# Allegro board NE555_2303.brd
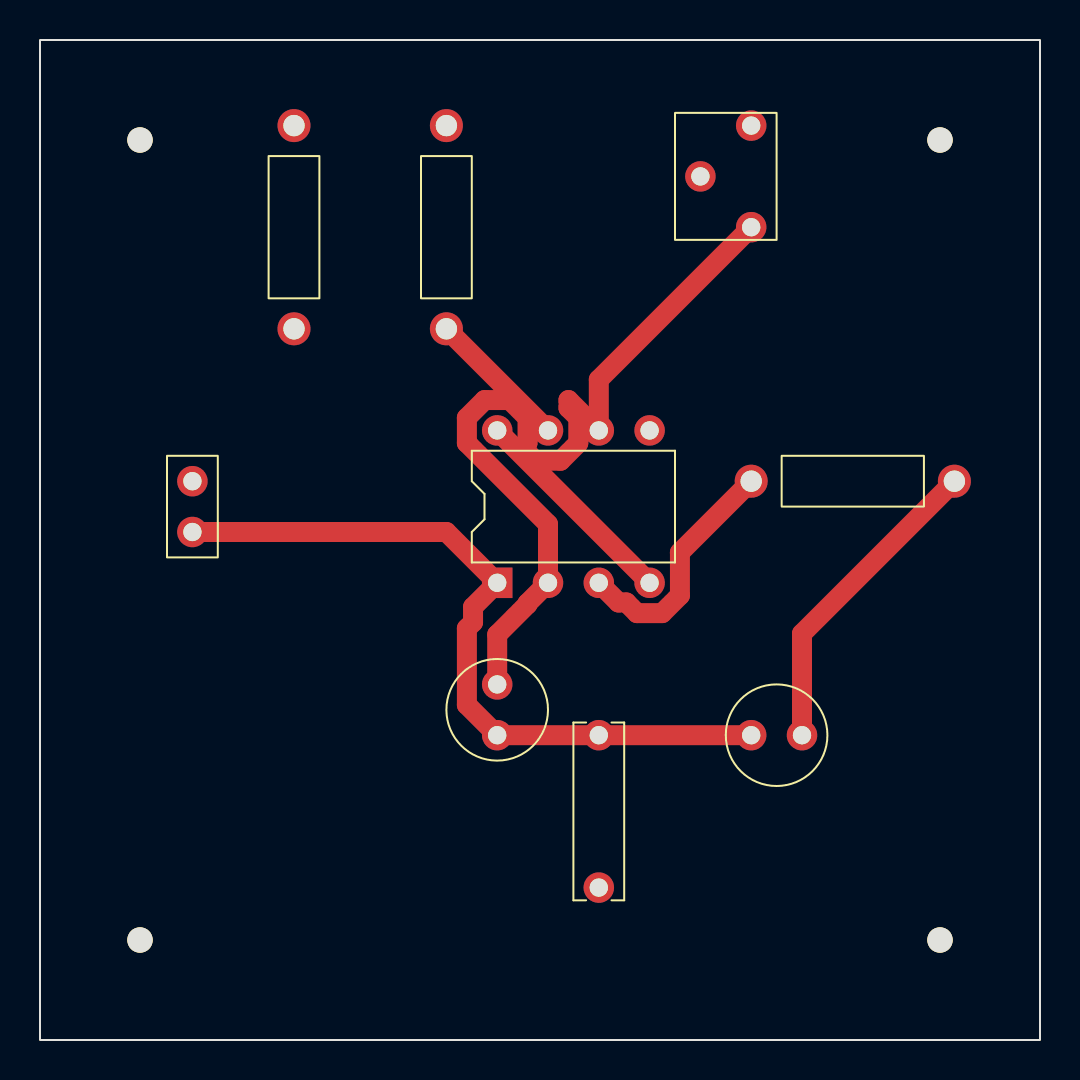
[diagram p0: board, top side]
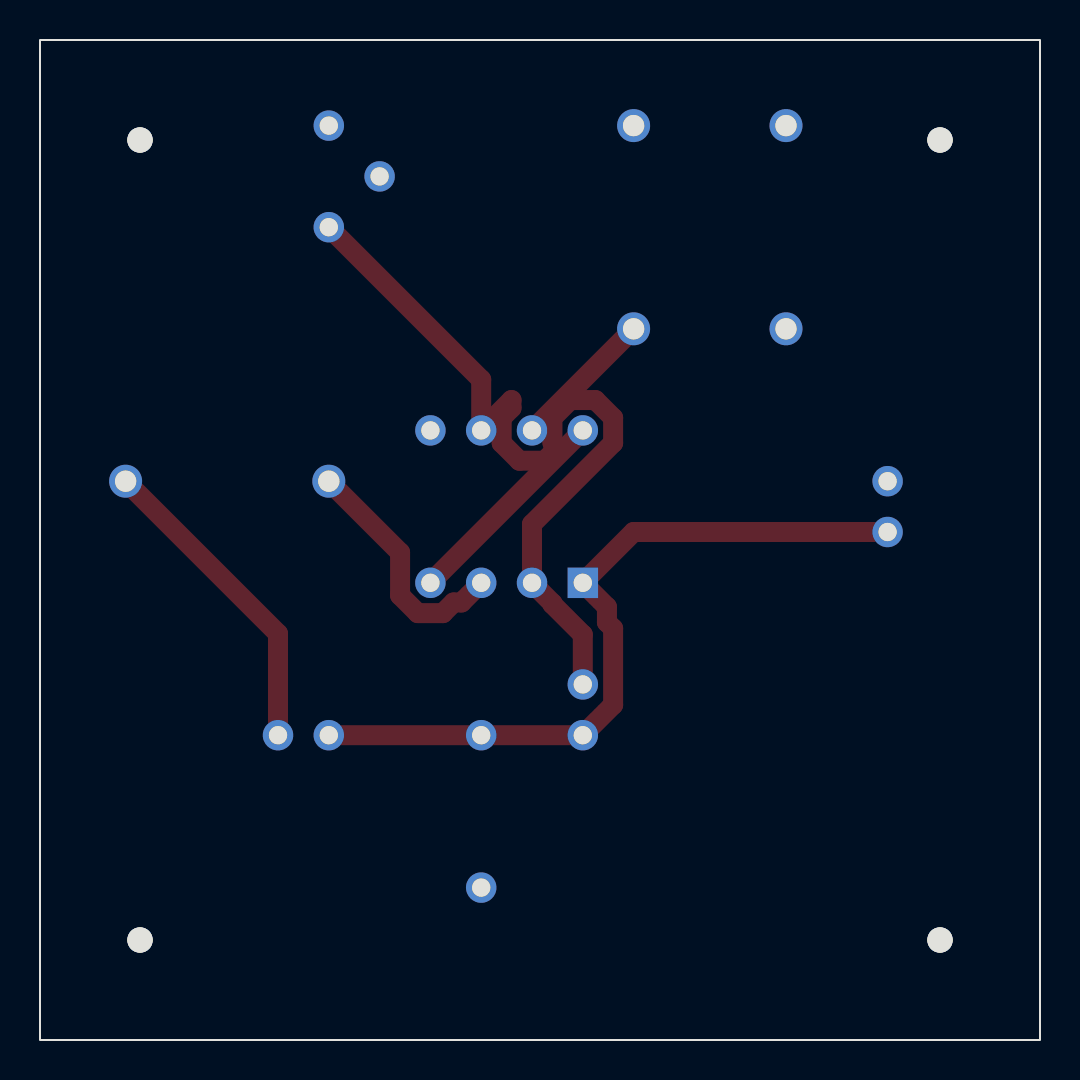
[diagram p1: board, bottom side, seen from below]

Outline 50 x 50 mm; copper layers: TOP, BOTTOM. Coordinates in mm from the lower left corner of the outline.
Outline path: rectangle 0,0 50,50

## Placement (name value [footprint] x y rotation side)
C1  10uF  [CAP196]  22.86 17.78 180 top
C2  0.1uF  [CAP300]  27.94 7.62 90 top
D1  LED  [CAP196]  35.56 15.24 270 top
J1  CON2  [JUMPER2]  7.62 27.94 270 top
NOREF  -  [unnamed]  5 45 0 top
NOREF#2  -  [unnamed]  45 5 0 top
NOREF#3  -  [unnamed]  5 5 0 top
NOREF#4  -  [unnamed]  45 45 0 top
R1  560  [RES400]  12.7 45.72 180 top
R2  1k  [RES400]  20.32 35.56 0 top
R3  100k  [RESADJ]  35.56 45.72 0 top
R4  220  [RES400]  35.56 27.94 270 top
U1  NE555  [DIP8_3]  22.86 22.86 90 top

## Library data of the parts
C1 = CAP POL: Tolerance: ***; User Part Number: ***
C2 = CAP NP: Tolerance: ***; User Part Number: ***
D1 = LED_1: Tolerance: ***; User Part Number: ***
J1 = CON2: User Part Number: ***
R1 R2 R4 = RESISTOR: Tolerance: ***; User Part Number: ***
R3 = RESISTOR VAR: Tolerance: ***; User Part Number: ***
U1 = NE555_0: Tolerance: ***; User Part Number: ***

## Footprints (pads in the part's own frame, mm; a bottom-side part is the same pattern mirrored in y, then rotated)
CAP196
  round 1.524 hole 0.914: 1(0,0) 2(0,2.54)
CAP300
  round 1.524 hole 0.914: 1(0,0) 2(7.62,0)
DIP8_3
  rect 1.524x1.524 hole 0.914: 1(0,0)
  round 1.524 hole 0.914: 2(0,-2.54) 3(0,-5.08) 4(0,-7.62) 5(7.62,-7.62) 6(7.62,-5.08) 7(7.62,-2.54) 8(7.62,0)
JUMPER2
  round 1.524 hole 0.914: 1(0,0) 2(2.54,0)
RES400
  round 1.651 hole 1.067: 1(0,0) 2(0,10.16)
RESADJ
  round 1.524 hole 0.914: 1(0,0) 2(-2.54,-2.54) 3(0,-5.08)
unnamed
  round 1.27 hole 3 unplated: (0,0)

## Nets
GND: C1.2 C2.2 D1.1(CATHODE) J1.2 U1.1
VCC: J1.1 R1.1 U1.4(RST) U1.8(VCC)
N00329: R2.2 R3.1(A)
N00333: R1.2 R2.1 U1.7(DSCHG)
N00462: C1.1 R3.2(WIPER) R3.3(B) U1.2(TRG) U1.6(THR)
N00675: C2.1 U1.5(CV)
N00682: R4.1 U1.3(OUT)
N00697: D1.2(ANODE) R4.2

## Routing (per net, layer and track width the routed paths; a pad name or vN(x,y) marks a point on that pad's centre or on a via; arc(x,y) is an arc through that point)
GND: length 37.9
  TOP w1: D1.1 C2.2 C1.2 21.34,16.76 21.34,20.58 21.65,20.89 21.65,21.65 U1.1 20.32,25.4 J1.2
VCC: length 10.8
  TOP w1: U1.4 U1.8
N00333: length 7.2
  TOP w1: U1.7 R2.1
N00462: length 42.7
  TOP w1: C1.1 22.86,20.27 24.38,21.79 24.38,21.84 U1.2 25.4,25.8 21.34,29.85 21.34,31.11 22.23,32 23.49,32 24.38,31.11 24.38,29.85 24.13,29.61 24.77,28.96 26.03,28.96 26.92,29.85 26.92,31.11 26.42,31.6 26.42,32 U1.6 27.94,33.02 R3.3
N00682: length 12.2
  TOP w1: R4.1 32,24.38 32,22.23 31.11,21.34 29.85,21.34 29.32,21.88 28.92,21.88 U1.3
N00697: length 15.9
  TOP w1: D1.2 38.1,20.32 R4.2
